# EAGLE board Customised arduino (EAGLE 9.6.2)
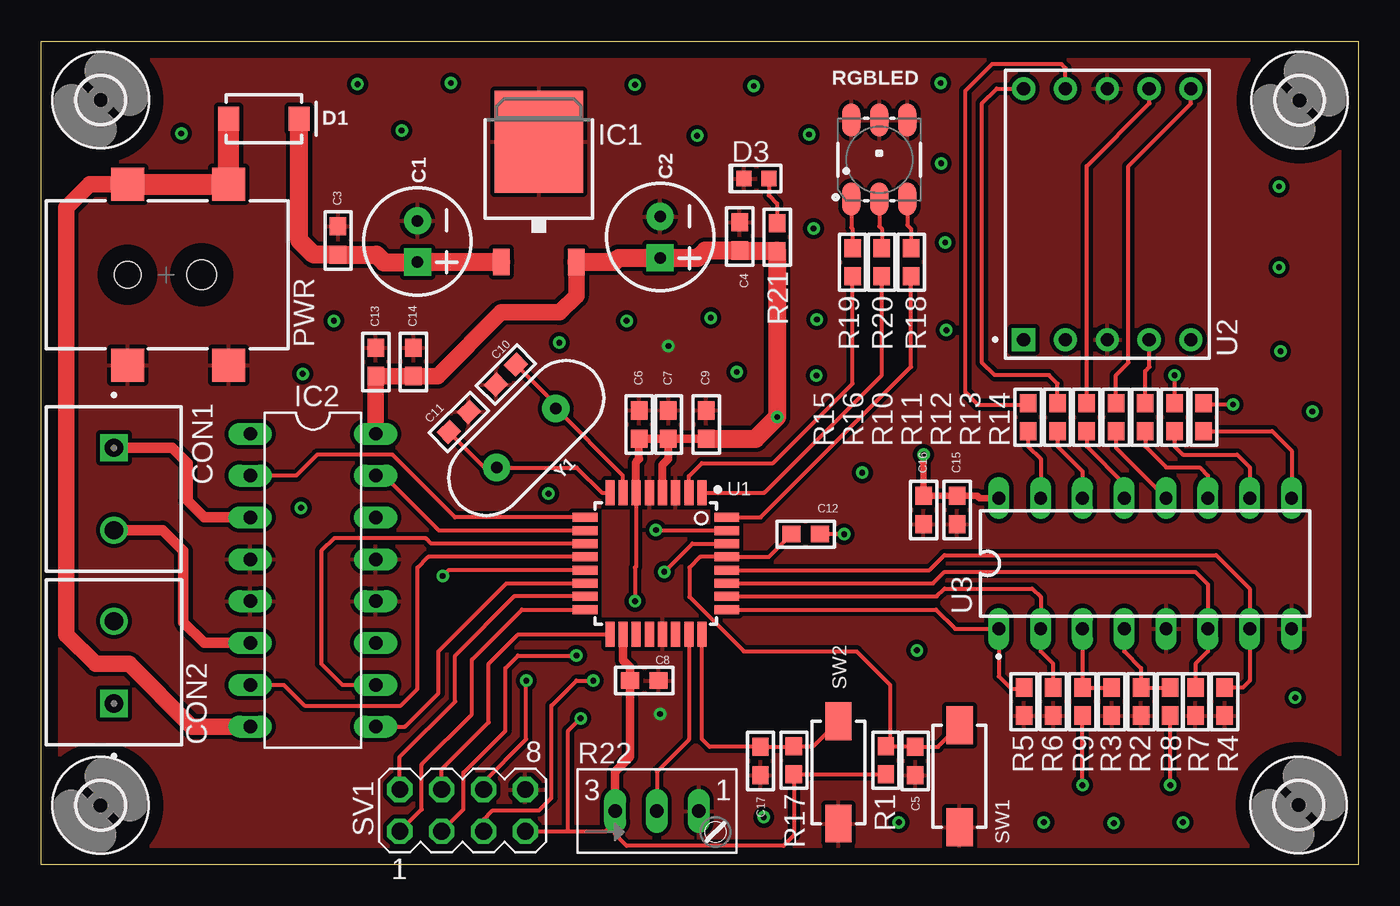
[diagram p0: board, top side]
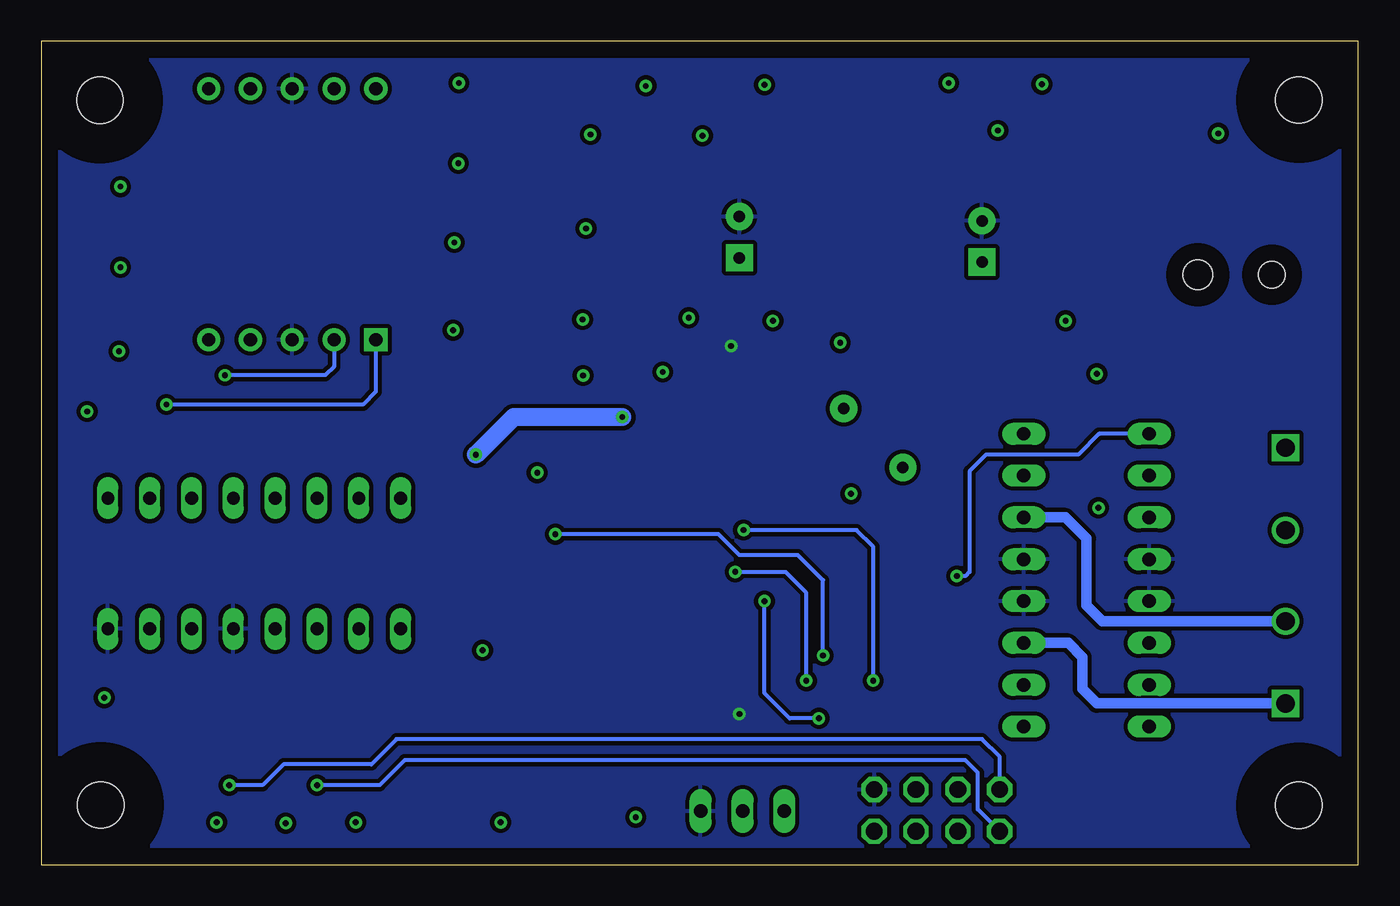
[diagram p1: board, bottom side, seen from below]

Size 80 x 50 mm. Coordinates in mm from the lower left corner, seen from the top.
Outline: 0,0 0,50 80,50 80,0 0,0
Copper layers (1*16): Top 0.035mm / dielectric 1.5mm / Bottom 0.035mm
Design rules "default": minimum track width 6mil, minimum drill 0.35mm, track to track 6mil, track to pad 6mil, pad to pad 6mil, via to via 6mil, smd to smd 6mil, copper to edge 40mil, drill to drill 6mil, minimum pad ring 10mil, minimum via ring 8mil, stop-mask expansion 4mil, vias tented up to drill 0mil, thermal gap 10mil

## Footprints (pad centres in the part's own frame; a part is rotated, then mirrored left to right if it is on the bottom)
CPOL-RADIAL-2.5MM-6.5MM = drill 0.7 pad 1.651 square: 1 1.25,0 | drill 0.7 pad 1.651: 2 -1.25,0
C0603 = smd 1.1 x 1: 1 -0.909,0; 2 0.809,0
CONN_282836-2 = drill 1.1 square: 1 -2.5,0 | drill 1.1: 2 2.5,0
SMA-DIODE = smd 1.27 x 1.47: A -2.15,0; C 2.15,0
LEDC1608X65N = smd 0.91 x 0.93: A 0.76,0; C -0.76,0
2,8 = hole 2.8: 0,0
TO252 = smd 1 x 1.6: 1 -2.28,-4.8; 2 2.28,-4.8 | smd 5.4 x 6.2: 3 0,2.5
DIL16 = drill 0.813 long: 1 -8.89,-3.81; 2 -6.35,-3.81; 3 -3.81,-3.81; 4 -1.27,-3.81; 5 1.27,-3.81; 6 3.81,-3.81; 7 6.35,-3.81; 8 8.89,-3.81; 9 8.89,3.81; 10 6.35,3.81; 11 3.81,3.81; 12 1.27,3.81; 13 -1.27,3.81; 14 -3.81,3.81; 15 -6.35,3.81; 16 -8.89,3.81
GCT_DCJ200-05-A-XX-X_REVA = smd 2 x 2: 1.1 -5.5,3.8; 1.2 -5.5,-2.35; 2 5.5,-2.35; 3 5.5,3.8 | hole 1.8: 0,2.15 | hole 1.6: 0,-2.35
R0603 = smd 1.1 x 1: 1 -0.85,0; 2 0.85,0
S64W = drill 0.813 long: A 2.54,1.27; E -2.54,1.27; S 0,1.27
LED-TRICOLOR-5050 = smd 2 x 1.1: 1 -2.4,1.7; 2 -2.4,0; 3 -2.4,-1.7; 4 2.4,-1.7; 5 2.4,0; 6 2.4,1.7
MA04-2 = drill 1.016 octagon: 1 -3.81,-1.27; 2 -3.81,1.27; 3 -1.27,-1.27; 4 -1.27,1.27; 5 1.27,-1.27; 6 1.27,1.27; 7 3.81,-1.27; 8 3.81,1.27
SW_1437566-3 = smd 2.3 x 1.6: 1 -3.08,0; 2 3.12,0
QFP80P900X900X120-32N = smd 1.5 x 0.55: 1 -4.3,2.8; 2 -4.3,2; 3 -4.3,1.2; 4 -4.3,0.4; 5 -4.3,-0.4; 6 -4.3,-1.2; 7 -4.3,-2; 8 -4.3,-2.8; 17 4.3,-2.8; 18 4.3,-2; 19 4.3,-1.2; 20 4.3,-0.4; 21 4.3,0.4; 22 4.3,1.2; 23 4.3,2; 24 4.3,2.8 | smd 0.55 x 1.5: 9 -2.8,-4.3; 10 -2,-4.3; 11 -1.2,-4.3; 12 -0.4,-4.3; 13 0.4,-4.3; 14 1.2,-4.3; 15 2,-4.3; 16 2.8,-4.3; 25 2.8,4.3; 26 2,4.3; 27 1.2,4.3; 28 0.4,4.3; 29 -0.4,4.3; 30 -1.2,4.3; 31 -2,4.3; 32 -2.8,4.3
LED_SC52-11HWA = drill 0.8 pad 1.4 square: 1 -7.62,5.08 | drill 0.8 pad 1.4: 2 -7.62,2.54; 3 -7.62,0; 4 -7.62,-2.54; 5 -7.62,-5.08; 6 7.62,-5.08; 7 7.62,-2.54; 8 7.62,0; 9 7.62,2.54; 10 7.62,5.08
DIP794W45P254L1969H508Q16 = drill 0.78 pad 1.13 long: 1 -3.97,8.89; 2 -3.97,6.35; 3 -3.97,3.81; 4 -3.97,1.27; 5 -3.97,-1.27; 6 -3.97,-3.81; 7 -3.97,-6.35; 8 -3.97,-8.89; 9 3.97,-8.89; 10 3.97,-6.35; 11 3.97,-3.81; 12 3.97,-1.27; 13 3.97,1.27; 14 3.97,3.81; 15 3.97,6.35; 16 3.97,8.89
HC49US = drill 0.7 pad 1.651: 1 -2.54,0; 2 2.54,0

## Placement (x,y rotation side)
C1  100uF  [CPOL-RADIAL-2.5MM-6.5MM]  22.86,37.85 270 top
C2  100uF  [CPOL-RADIAL-2.5MM-6.5MM]  37.59,38.1 270 top
C3  0.1uF  [C0603]  18.03,37.85 270 top
C4  0.1uF  [C0603]  42.42,38.1 270 top
C5  0.1uF  [C0603]  53.09,6.35 90 top
C6  0.1uF  [C0603]  36.32,26.67 270 top
C7  0.1uF  [C0603]  38.1,26.67 270 top
C8  0.1uF  [C0603]  36.58,11.18 180 top
C9  22uF  [C0603]  40.39,26.67 270 top
C10  22pF  [C0603]  28.19,29.72 225 top
C11  22pF  [C0603]  25.4,26.92 45 top
C12  0.1uF  [C0603]  46.48,20.07 0 top
C13  10uF  [C0603]  20.32,30.48 270 top
C14  0.1uF  [C0603]  22.61,30.48 270 top
C15  10uF  [C0603]  55.63,21.59 90 top
C16  0.1uF  [C0603]  53.59,21.59 90 top
C17  0.1uF  [C0603]  43.69,6.35 90 top
CON1  MOTOR1  [CONN_282836-2]  4.42,22.81 270 top
CON2  MOTOR2  [CONN_282836-2]  4.42,12.29 90 top
D1  1A/40V/500mV  [SMA-DIODE]  13.53,45.3 0 top
D3  RED  [LEDC1608X65N]  43.43,41.66 0 top
H1  MOUNT-HOLE2.8  [2,8]  3.62,46.42 0 top
H2  MOUNT-HOLE2.8  [2,8]  76.43,46.41 0 top
H3  MOUNT-HOLE2.8  [2,8]  76.38,3.63 0 top
H4  MOUNT-HOLE2.8  [2,8]  3.61,3.6 0 top
IC1  7805DT  [TO252]  30.23,41.4 0 top
IC2  L293D  [DIL16]  16.51,17.27 270 top
PWR  DCJ200-05-A-XX-X_REVA  [GCT_DCJ200-05-A-XX-X_REVA]  7.59,35.81 270 top
R1  10K  [R0603]  51.31,6.35 270 top
R2  10K  [R0603]  66.8,9.91 90 top
R3  10K  [R0603]  65.02,9.91 90 top
R4  10K  [R0603]  71.88,9.91 90 top
R5  10K  [R0603]  59.69,9.91 90 top
R6  10K  [R0603]  61.47,9.91 90 top
R7  10K  [R0603]  70.1,9.91 90 top
R8  0R  [R0603]  68.58,9.91 270 top
R9  0R  [R0603]  63.25,9.91 270 top
R10  330R  [R0603]  63.5,27.18 270 top
R11  330R  [R0603]  65.28,27.18 270 top
R12  330R  [R0603]  67.06,27.18 270 top
R13  330R  [R0603]  68.83,27.18 270 top
R14  330R  [R0603]  70.61,27.18 270 top
R15  330R  [R0603]  59.94,27.18 270 top
R16  330R  [R0603]  61.72,27.18 270 top
R17  10K  [R0603]  45.72,6.35 270 top
R18  2K  [R0603]  52.83,36.58 270 top
R19  2K  [R0603]  49.28,36.58 270 top
R20  2K  [R0603]  51.05,36.58 270 top
R21  2K  [R0603]  44.7,38.1 270 top
R22  10K  [S64W]  37.4,1.99 0 top
RGBLED  [LED-TRICOLOR-5050]  50.9,42.81 90 top
SV1  [MA04-2]  25.59,3.3 0 top
SW1  SWITCH  [SW_1437566-3]  55.78,5.35 90 top
SW2  SWITCH  [SW_1437566-3]  48.42,5.58 90 top
U1  ATMEGA328-AU  [QFP80P900X900X120-32N]  37.34,18.29 270 top
U2  SC52-11HWA  [LED_SC52-11HWA]  64.75,39.5 90 top
U3  CD4511BE  [DIP794W45P254L1969H508Q16]  67.06,18.29 90 top
Y1  16MHz  [HC49US]  29.46,25.91 45 top

## Library data of the parts
C1 C2 = SparkFun-Capacitors; PROD_ID: CAP-08439
C3-C17 = PC_Capacitor_0603; AVAILABILITY: Good; DESCRIPTION: 0.1µF ±10% 50V Ceramic Capacitor X7R 0603 (1608 Metric); MF: TDK; MP: CGA3E2X7R1H104K080AA; PACKAGE: 1608 TDK; PRICE: None; PURCHASE-URL: https://pricing.snapeda.com/search/part/CGA3E2X7R1H104K080AA/?ref=eda
CON1 CON2 = PC_Con_ScrewTerminal_2P_5mm; AVAILABILITY: In Stock; COMMENT: 282836-2; DESCRIPTION: Connector, Terminal Block; Wire Receptacle; 2 Pos.; 16-30 AWG; 0.197 in. CL; Sid; MF: TE Connectivity; MP: 282836-2; PACKAGE: None; PRICE: None; PURCHASE-URL: https://pricing.snapeda.com/search/part/282836-2/?ref=eda
D1 = SparkFun-DiscreteSemi; PROD_ID: DIO-08053
D3 = PC_LED_0603; AVAILABILITY: Warning; DESCRIPTION: White LED Indication - Discrete 3.1V 0603 (1608 Metric); MF: Lite-On; MP: LTW-C191TLA; PACKAGE: 0603 Lite-On; PRICE: None; PURCHASE-URL: https://pricing.snapeda.com/search/part/LTW-C191TLA/?ref=eda
H1-H4 = holes
IC1 = linear
IC2 = st-microelectronics; MPN: L293D; OC_FARNELL: 9589619; OC_NEWARK: 56P8249
PWR = PC_CON_DC_Power_Jack; AVAILABILITY: Warning; DESCRIPTION: Power Barrel Connector Jack 2.05mm ID (0.081), 5.50mm OD (0.217) Surface Mount, Right Angle; MF: Global Connector Technology; MP: DCJ200-05-A-K1-A; PACKAGE: None; PRICE: None; PURCHASE-URL: https://pricing.snapeda.com/search/part/DCJ200-05-A-K1-A/?ref=eda
R1-R21 = PC_Resistor_0603; MF: Yageo; RESISTOR: 0603
R22 = pot
RGBLED = SparkFun-LED; PROD_ID: DIO-10298
SV1 = con-lstb; OC_FARNELL: unknown; OC_NEWARK: unknown
SW1 SW2 = PC_Switch_1437566-3; AVAILABILITY: Good; COMMENT: 1437566-3; CONFIGURATION_POLE-THROW: Single Pole - Single Throw; CONTACT_CURRENT_RATING: 50 mA; DESCRIPTION: Tactile Switch SPST-NO Top Actuated Surface Mount; MF: TE Connectivity; MP: 1437566-3; PACKAGE: None; PRICE: None
U1 = PC_IC_ATMEGA328-AU; AVAILABILITY: In Stock; DESCRIPTION: AVR AVR® ATmega Microcontroller IC 8-Bit 20MHz 32KB (16K x 16) FLASH 32-TQFP (7x7); MF: Microchip; MP: ATMEGA328-AU; PACKAGE: TQFP-32 Microchip; PRICE: None; PURCHASE-URL: https://pricing.snapeda.com/search/part/ATMEGA328-AU/?ref=eda
U2 = PC_LED-7-SegmentDisplay; AVAILABILITY: Not in stock; DESCRIPTION: Display: LED; single 7-segment; 13.2mm; red; 0.9-2.2mcd; MF: Kingbright; MP: SC52-11HWA; PACKAGE: None; PRICE: None
U3 = PC_IC_CD4511BE; AVAILABILITY: In Stock; DESCRIPTION: CMOS BCD-to-7-Segment LED Latch Decoder Drivers 16-PDIP -55 to 125; MF: Texas Instruments; MP: CD4511BE; PACKAGE: PDIP-16 Texas Instruments; PRICE: None; PURCHASE-URL: https://pricing.snapeda.com/search/part/CD4511BE/?ref=eda
Y1 = SparkFun-Clocks; PROD_ID: XTAL-08181; SF_ID: COM-00536

## Nets
+5V: C2.1 C4.2 C6.2 C7.2 C8.2 C9.2 C13.2 C14.2 C15.2 C16.2 IC1.2 IC2.16 R1.2 R17.2 R21.2 R22.E SV1.7 U1.4 U1.6 U1.18 U3.16
+12V: D1.A IC2.8 PWR.1.1 PWR.1.2
ANALOG_OUT: R22.S U1.23
BLANKING_INPUT: R2.2 R8.1 U3.4
BLUE_LED: R18.2 U1.32
DEBUG_RX: SV1.5 U1.30
DEBUG_TX: SV1.6 U1.31
DISPLAY_TEST: R3.2 R9.1 U3.3
GND: C1.2 C2.2 C3.1 C4.1 C5.1 C6.1 C7.1 C8.1 C9.1 C10.2 C11.2 C13.1 C14.1 C15.1 C16.1 C17.1 D3.C IC1.3 IC2.4 IC2.5 IC2.12 IC2.13 PWR.2 PWR.3 R2.1 R3.1 R4.1 R5.1 R6.1 R7.1 R22.A RGBLED.4 RGBLED.5 RGBLED.6 SV1.8 SW1.1 SW2.1 U1.3 U1.5 U1.21 U2.3 U2.8 U3.5 U3.8
GREEN_LED: R19.2 U1.2
INPUT_SW: C17.2 R17.1 SW2.2 U1.24
MISO: R9.2 SV1.1 U1.16
MOSI: R8.2 SV1.2 U1.15
MTR1_EN: IC2.1 U1.13
MTR1_IN_1: IC2.2 U1.9
MTR1_IN_2: IC2.7 U1.12
MTR2_EN: IC2.9 U1.14
MTR2_IN_1: IC2.15 U1.10
MTR2_IN_2: IC2.10 U1.11
N$1: C10.1 U1.7 Y1.2
N$2: C1.1 C3.2 D1.C IC1.1
N$3: C5.2 C12.1 R1.1 SW1.2 U1.29
N$4: C11.1 U1.8 Y1.1
N$5: CON1.1 IC2.3
N$6: CON1.2 IC2.6
N$7: CON2.2 IC2.14
N$8: CON2.1 IC2.11
N$9: R10.2 U3.13
N$10: R11.2 U3.12
N$11: R12.2 U3.11
N$12: R13.2 U3.10
N$13: R14.2 U3.9
N$14: R15.2 U3.15
N$15: R16.2 U3.14
N$16: R10.1 U2.7
N$17: R11.1 U2.6
N$18: R12.1 U2.4
N$19: R13.1 U2.2
N$20: R14.1 U2.1
N$21: R15.1 U2.9
N$22: R16.1 U2.10
N$23: R18.1 RGBLED.3
N$24: R19.1 RGBLED.1
N$25: R20.1 RGBLED.2
N$26: D3.A R21.1
RED_LED: R20.2 U1.1
RESET: C12.2 SV1.3
SCK: SV1.4 U1.17
SSD_A: R4.2 U1.28 U3.7
SSD_B: R5.2 U1.25 U3.1
SSD_C: R6.2 U1.26 U3.2
SSD_D: R7.2 U1.27 U3.6

## Tracks (layer width: path | path; a pad name or v marks a point on that pad's centre or on a via)
+5V  (via drill 0.35)
  Top 0.254: SV1.7 32,2.02 | 32,2.02 34.28,2.02 34.86,2.6 R22.E 34.86,1.84 35.56,1.14 45.09,1.14 45.72,1.78 R17.2 R1.2 | 32,2.02 32,8.13 v32.77,8.89 | 36.07,22.52 U1.6 36.14,18.1 36.07,18.03 v36.07,16
  Top 0.381: v53.59,24.89 C16.2 C15.2 56.85,22.4 56.99,22.26 U3.16
  Top 0.483: U1.6 36.14,24.45 36.32,24.64 C6.2 | U1.4 37.74,24.28 38.1,24.64 C7.2
  Top 0.508: U1.18 35.34,12.41 35.77,11.98 C8.2 35.77,6.56 34.86,5.65 R22.E | C9.2 C7.2 C6.2
  Top 1.016: IC1.2 32.51,34.54 31.5,33.53 27.94,33.53 24.08,29.67 C14.2 C13.2 IC2.16
  Top 1.092: IC1.2 34.82,36.6 35.07,36.85 C2.1 37.61,36.83 39.88,36.83 40.34,37.29 C4.2 44.66,37.29 R21.2 v44.7,27.18 43.39,25.86 C9.2
  Bottom 0.254: v32.77,8.89 34.54,8.89 36.07,10.41 v36.07,16
  Bottom 1.092: v44.7,27.18 51.31,27.18 v53.59,24.89
+12V
  Top 1.016: IC2.8 9.14,8.38 5.33,12.19 3.3,12.19 1.52,13.97 1.52,39.88 2.96,41.31 PWR.1.2
  Top 1.27: PWR.1.2 PWR.1.1 11.39,45.28 D1.A
ANALOG_OUT
  Top 0.254: U1.23 39.34,7.59 37.4,5.65 R22.S
BLANKING_INPUT
  Top 0.254: U3.4 65.79,12.95 66.8,11.94 R2.2 R8.1
BLUE_LED
  Top 0.254: U1.32 43.69,21.09 52.83,30.23 R18.2
DEBUG_RX  (via drill 0.35)
  Top 0.254: U1.30 39.55,19.49 v37.85,17.78 | SV1.5 26.86,2.73 27.43,3.3 30.23,3.3 30.99,4.06 30.99,9.65 32.51,11.18 v33.53,11.18
  Bottom 0.254: v33.53,11.18 33.53,16.51 34.8,17.78 v37.85,17.78
DEBUG_TX  (via drill 0.35)
  Top 0.254: U1.31 37.37,20.29 v37.34,20.32 | SV1.6 26.86,5.02 29.46,7.62 v29.46,11.18
  Bottom 0.254: v29.46,11.18 29.46,19.3 30.48,20.32 v37.34,20.32
DISPLAY_TEST
  Top 0.254: U3.3 R9.1 R3.2
GND  (via drill 0.35)
  other vias: 37.59,9.14 38.1,31.5
  pour Top (isolate 0.254): -3.05,51.56 -3.05,-3.56 82.8,-3.56 82.8,51.56 -2.79,51.56
  pour Bottom (isolate 0.254): -2.79,51.56 -2.79,-2.29 83.31,-2.29 83.31,51.56
GND1  (via drill 0.35)
  other vias: 35.56,33.02
GND2  (via drill 0.35)
  other vias: 17.78,33.02
GND3  (via drill 0.35)
  other vias: 8.51,44.4
GND4  (via drill 0.35)
  other vias: 21.89,44.57
GND5  (via drill 0.35)
  other vias: 39.84,44.26
GND6  (via drill 0.35)
  other vias: 40.66,33.21
GND7  (via drill 0.35)
  other vias: 24.88,47.46
GND8  (via drill 0.35)
  other vias: 19.22,47.39
GND9  (via drill 0.35)
  other vias: 36.07,47.35
GND10  (via drill 0.35)
  other vias: 43.27,47.29
GND11  (via drill 0.35)
  other vias: 46.63,44.33
GND12  (via drill 0.35)
  other vias: 47.12,33.1
GND13  (via drill 0.35)
  other vias: 46.91,38.63
GND14  (via drill 0.35)
  other vias: 54.63,47.46
GND15  (via drill 0.35)
  other vias: 54.66,42.58
GND16  (via drill 0.35)
  other vias: 54.91,37.77
GND17  (via drill 0.35)
  other vias: 54.97,32.45
GND18  (via drill 0.35)
  other vias: 42.24,29.91
GND19  (via drill 0.35)
  other vias: 47.08,29.7
GND20  (via drill 0.35)
  other vias: 15.89,29.81
GND21  (via drill 0.35)
  other vias: 31.47,31.7
GND22  (via drill 0.35)
  other vias: 30.82,22.53
GND23  (via drill 0.35)
  other vias: 15.79,21.67
GND24  (via drill 0.35)
  other vias: 43.89,2.88
GND25  (via drill 0.35)
  other vias: 52.09,2.58
GND26  (via drill 0.35)
  other vias: 53.19,13.01
GND27  (via drill 0.35)
  other vias: 60.89,2.57
GND28  (via drill 0.35)
  other vias: 65.15,2.52
GND29  (via drill 0.35)
  other vias: 69.35,2.57
GND30  (via drill 0.35)
  other vias: 76.17,10.14
GND31  (via drill 0.35)
  other vias: 49.87,23.8
GND32  (via drill 0.35)
  other vias: 75.18,41.17
GND33  (via drill 0.35)
  other vias: 75.18,36.27
GND34  (via drill 0.35)
  other vias: 75.28,31.17
GND35  (via drill 0.35)
  other vias: 77.21,27.51
GREEN_LED
  Top 0.254: U1.2 39.34,23.59 40.13,24.38 44.45,24.38 49.28,29.21 R19.2
INPUT_SW
  Top 0.254: SW2.2 46.92,7.2 R17.1 45.68,7.16 C17.2 40.59,7.16 40.13,7.62 U1.24
MISO  (via drill 0.35)
  Top 0.254: SV1.1 23.11,3.35 23.11,6.1 26.16,9.14 26.16,12.45 29.2,15.49 U1.16 | v63.25,4.83 R9.2
  Bottom 0.254: SV1.1 23.11,3.35 23.11,5.59 23.88,6.35 57.91,6.35 59.44,4.83 v63.25,4.83
MOSI  (via drill 0.35)
  Top 0.254: U1.15 28.73,16.29 25.15,12.7 25.15,9.91 21.78,6.54 SV1.2 | v68.58,4.83 R8.2
  Bottom 0.254: SV1.2 21.78,6.54 22.86,7.62 58.42,7.62 59.94,6.1 65.28,6.1 66.55,4.83 v68.58,4.83
MTR1_EN  (via drill 0.35)
  Top 0.254: U1.13 24.75,17.89 v24.38,17.53
  Bottom 0.254: IC2.1 15.75,26.16 17.02,24.89 22.61,24.89 23.62,23.88 23.62,17.78 23.88,17.53 v24.38,17.53
MTR1_IN_1
  Top 0.254: U1.9 25.14,21.09 21.34,24.89 16.76,24.89 15.49,23.62 IC2.2
MTR1_IN_2
  Top 0.254: U1.12 23.51,18.69 22.86,18.03 22.86,10.67 21.84,9.65 16,9.65 14.73,10.92 IC2.7
MTR2_EN
  Top 0.254: IC2.9 22.1,8.38 24.13,10.41 24.13,12.95 28.26,17.09 U1.14
MTR2_IN_1
  Top 0.254: U1.10 24.16,20.29 20.83,23.62 IC2.15
MTR2_IN_2
  Top 0.254: IC2.10 18.29,10.92 17.02,12.19 17.02,19.05 17.78,19.81 23.37,19.81 23.69,19.49 U1.11
N$1
  Top 0.254: U1.7 35.34,23.63 Y1.2 31.26,27.94 C10.1
N$2
  Top 1.092: D1.C 15.68,37.91 16.56,37.04 C3.2 20.37,37.04 20.83,36.58 22.84,36.58 C1.1 IC1.1
N$3
  Top 0.254: C12.1 44.2,18.69 U1.29 40.02,18.69 39.37,18.03 39.37,16.26 42.67,12.95 49.53,12.95 51.56,10.92 51.56,7.45 R1.1 53.05,7.2 C5.2 54.47,7.16 SW1.2
N$4
  Top 0.254: 34.51,22.61 U1.8 34.05,22.59 32.53,24.11 Y1.1 26.93,24.11 C11.1
N$5
  Top 0.635: CON1.1 7.97,25.31 8.89,24.38 8.89,22.1 9.91,21.08 IC2.3
N$6
  Top 0.635: CON1.2 7.38,20.31 8.64,19.05 8.64,14.73 9.91,13.46 IC2.6
N$7
  Bottom 0.635: CON2.2 15.55,14.79 16.51,15.75 16.51,19.81 17.78,21.08 IC2.14
N$8
  Bottom 0.635: CON2.1 15.88,9.79 16.76,10.67 16.76,12.61 17.62,13.46 IC2.11
N$9
  Top 0.254: R10.2 63.5,25.4 65.79,23.11 U3.13
N$10
  Top 0.254: R11.2 65.28,25.31 U3.12
N$11
  Top 0.254: R12.2 67.06,25.4 68.33,24.13 70.36,24.13 70.87,23.62 U3.11
N$12
  Top 0.254: R13.2 68.83,25.4 69.34,24.89 72.64,24.89 73.41,24.13 U3.10
N$13
  Top 0.254: R14.2 74.76,26.33 75.95,25.15 U3.9
N$14
  Top 0.254: R15.2 59.94,25.4 60.71,24.64 U3.15
N$15
  Top 0.254: R16.2 61.72,25.4 63.25,23.88 U3.14
N$16
  Top 0.254: R10.1 63.5,42.42 67.31,46.23 67.31,47.1 U2.7
N$17
  Top 0.254: R11.1 65.28,29.72 66.04,30.48 66.04,42.42 69.83,46.21 U2.6
N$18
  Top 0.254: R12.1 67.06,29.97 67.31,30.23 67.31,31.86 U2.4
N$19  (via drill 0.35)
  Top 0.254: v68.83,29.72 R13.1
  Bottom 0.254: U2.2 62.21,30.24 62.74,29.72 v68.83,29.72
N$20  (via drill 0.35)
  Top 0.254: v72.39,27.94 70.7,27.94 R14.1
  Bottom 0.254: U2.1 59.67,28.72 60.45,27.94 v72.39,27.94
N$21
  Top 0.254: U2.9 62.21,48.37 61.98,48.6 57.75,48.6 56.13,46.99 56.13,28.7 56.9,27.94 59.86,27.94 R15.1
N$22
  Top 0.254: R16.1 61.72,29.21 61.21,29.72 57.91,29.72 57.15,30.48 57.15,46.23 58.04,47.12 U2.10
N$23
  Top 0.254: RGBLED.3 52.6,38.84 52.83,38.61 R18.1
N$24
  Top 0.254: R19.1 49.28,38.61 49.2,38.68 RGBLED.1
N$25
  Top 0.254: RGBLED.2 50.9,38.76 51.05,38.61 R20.1
N$26
  Top 0.254: D3.A 44.19,40.64 44.7,40.13 R21.1
RED_LED
  Top 0.254: U1.1 43.92,22.59 51.05,29.72 R20.2
RESET  (via drill 0.35)
  Top 0.254: v48.77,20.07 C12.2 | SV1.3 25.65,3.35 25.65,5.59 28.19,8.13 28.19,11.94 28.96,12.7 v32.51,12.7
  Bottom 0.254: v32.51,12.7 32.51,17.27 34.04,18.8 37.59,18.8 38.86,20.07 v48.77,20.07
SCK
  Top 0.254: SV1.4 24.32,5.78 27.18,8.64 27.18,12.19 28.97,13.99 U1.17
SSD_A
  Top 0.254: R4.2 72.99,10.76 73.41,11.18 U3.7 73.41,16.76 71.37,18.8 54.86,18.8 53.96,17.89 U1.28
SSD_B
  Top 0.254: U1.25 54.36,15.49 | 54.36,15.49 | 54.36,15.49 55.53,14.32 U3.1 58.17,11.43 58.93,10.67 59.6,10.67 R5.2
SSD_C
  Top 0.254: U1.26 54.39,16.29 54.86,16.76 60.2,16.76 60.71,16.26 U3.2 60.71,12.95 61.47,12.19 R6.2
SSD_D
  Top 0.254: U1.27 54.17,17.09 54.86,17.78 70.1,17.78 70.87,17.02 U3.6 70.87,12.95 70.1,12.19 R7.2